# Altium PCB microwaveBoardAntenna.PcbDoc
Units mm, origin at the board's own origin, x right, y up, seen from the top; angles counter-clockwise.
Board outline 60 x 25 mm, 2 copper layers (Top Layer, Bottom Layer), stack 1.6 mm thick; 2 components, 2 nets, 15 pads, 6 vias.
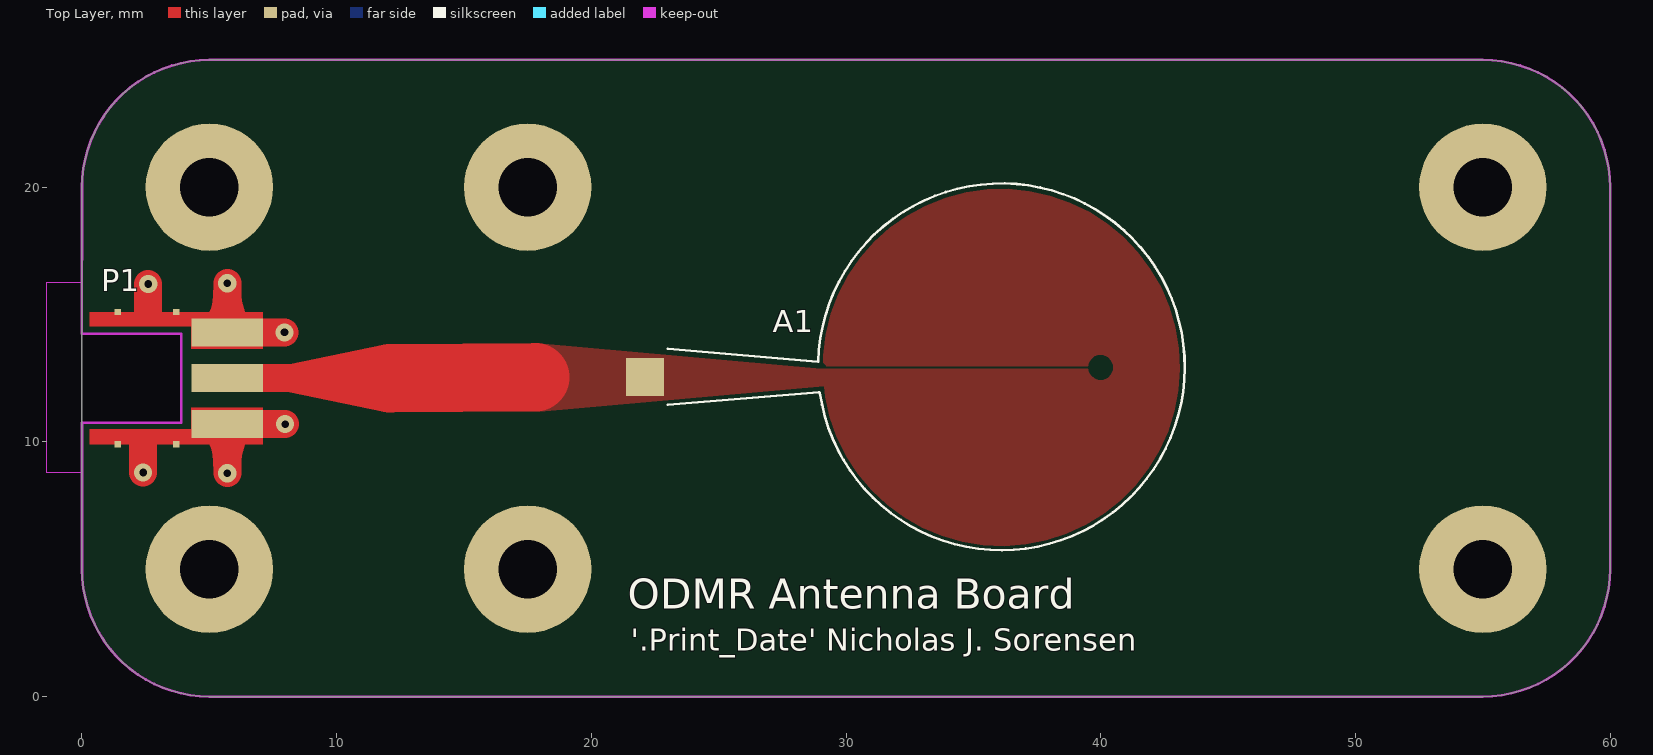
[diagram p0: Top Layer view]
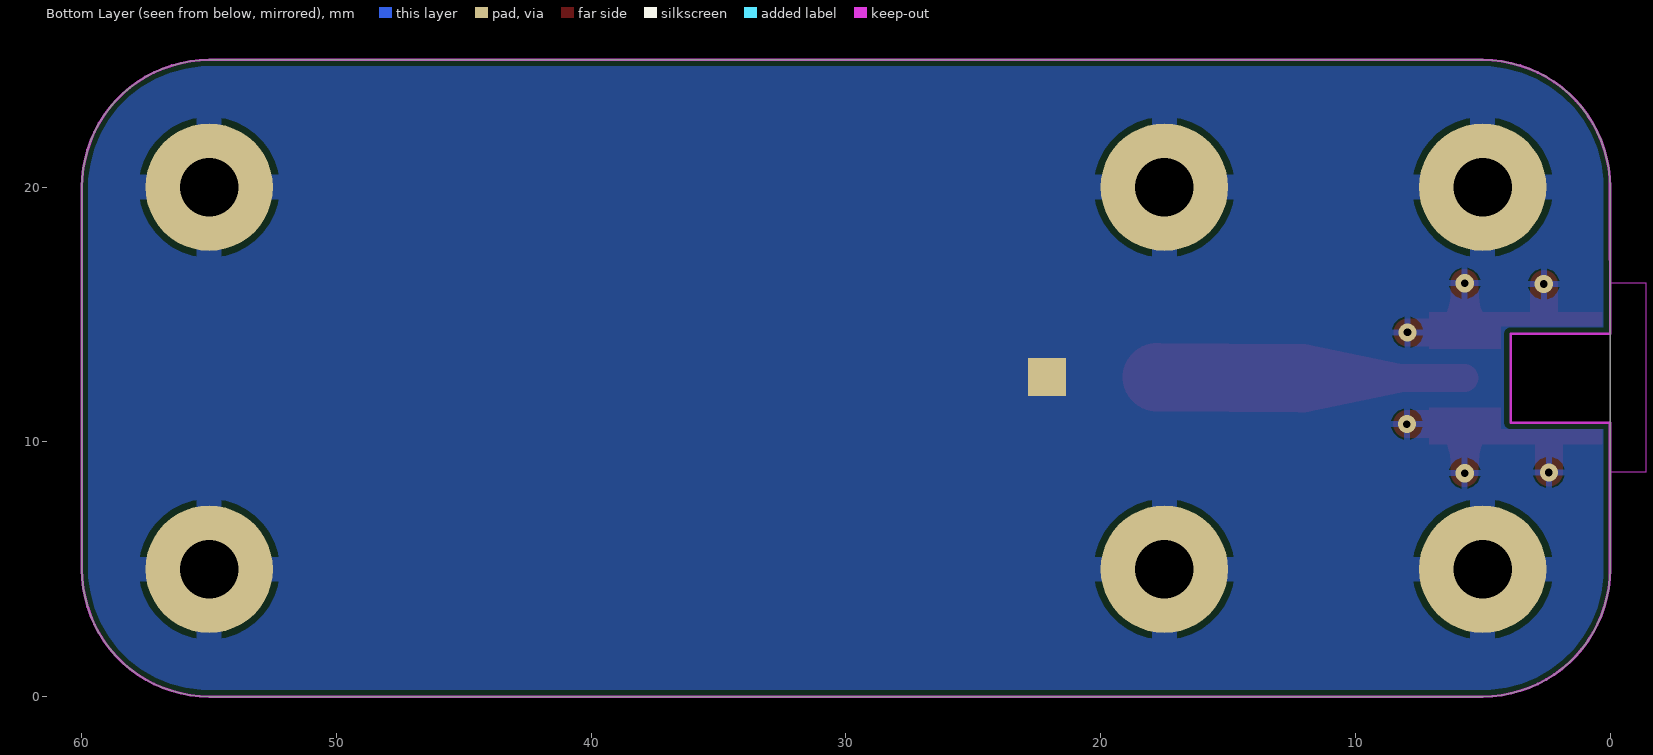
[diagram p1: Bottom Layer view, seen from below]

## Layer stack, top to bottom
Top Solder: solder mask 0.03, Solder Resist, Dk 3.5
Top Layer: signal copper 0.035
Dielectric 1: dielectric 1.53, FR-4, Dk 4.3
Bottom Layer: signal copper 0.035
Bottom Solder: solder mask 0.03, Solder Resist, Dk 3.5

## Board outline
5,0 cw(c5,5) 0,5 0,20 cw(c5,20) 5,25 55,25 cw(c55,20) 60,20 60,5 cw(c55,5) 55,0

## Design rules (kind name [scope] priority, off if disabled: settings)
BoardOutlineClearance [All] p1: gap=0.254 ignorepadtopadclearanceinfootprint=FALSE except(0: Arc-SplitContinuation Track-SplitContinuation SMDPad-SplitContinuation THPad-SplitContinuation Via-SplitContinuation Fill-SplitContinuation Poly-SplitContinuation Region-SplitContinuation Text-SplitContinuation)
Clearance [All] p1: gap=0.102 ignorepadtopadclearanceinfootprint=FALSE
HoleSize [All] p1: absolutevalues=TRUE maxlimit=6.3 minlimit=0.2 maxpercent=80.000 minpercent=20.000
MinimumAnnularRing [All] p1: minimumring=0.15
MinimumSolderMaskSliver [All] p1: minsoldermaskwidth=0.3
PolygonConnect PolygonConnectAntenna [InComponent('A1')] p1: connectstyle=Direct reliefconductorwidth=0.254 reliefentries=4 polygonreliefangle="90 Angle" airgapwidth=0.254
PolygonConnect PolygonConnect_1 [All] p2: connectstyle=Relief reliefconductorwidth=0.254 reliefentries=4 polygonreliefangle="90 Angle" airgapwidth=0.254
RoutingVias [All] p1: holewidth=0.3 width=0.71 viastyle="Through Hole" minholewidth=0.3 minwidth=0.71 maxholewidth=0.3 maxwidth=0.71
SilkToSilkClearance [All] p1: silktosilkclearance=0
SolderMaskExpansion [All] p1: expansion=0.102 istentingtop=FALSE
Width [All] p1: maxlimit=3 minlimit=1 preferedwidth=3 impedanceprofiledriven=TRUE impedanceprofileid={4A0EECF2-8292-4236-9601-4AF723990B04} impedanceprofilevalue=50.000000 minimp=50.000000 maximp=50.000000 favimp=50.000000
27 further rules are at their usual default settings.

## Components (designator, comment, footprint, x,y, rotation, side; value= is the part's Value field where it differs from the comment)
A1 "ODMR Antenna" ODMR_ANTENNA 40,12.95 r0 top
P1 "MMCXV-J-P-HF-ST-EM1" MMCXV-J-P-HF-ST-EM1 0,12.5 r90 top

## Footprints (in the part's own frame and the unit in brackets; to place one, negate y for a bottom-side part, rotate by r counter-clockwise, add the part's x,y. Pads: shape width x height; smd on the part's side, far side on the other; paste and mask are expansions set on the pad)
MMCXV-J-P-HF-ST-EM1 [mm]
  rect 1.1x2.8 smd: 1(0,-5.705)
  rect 0.254x0.254 smd: 2(-2.6,-1.395) 2(-2.6,-3.695) 2(2.6,-1.395) 2(2.6,-3.695)
  rect 1.1x2.8 smd paste-2 mask+0: 2(-1.8,-5.705) 2(1.8,-5.705)
  Top Layer region: 2.05,-4.295 1.15,-4.295 1.15,-7.105 2.6,-7.105 2.6,-0.305 2.05,-0.305
  Top Layer region: -2,-4.295 -1.15,-4.295 -1.15,-7.105 -2.6,-7.105 -2.6,-0.305 -2,-0.305
  Keep-Out Layer board cut-out: -3.7,0.005 -1.74,0.005 -1.74,-3.905 1.74,-3.905 1.74,0.005 3.75,0.005 3.75,1.405 -3.7,1.405
  Keep-Out Layer lines w0.1: -1.74,0.005 -1.74,-3.905 1.74,-3.905 1.74,0.005
  body extent -2.25,-6.71 2.25,0.69, height 2.11
ODMR_ANTENNA [mm]
  rect 1.5x1.5 smd paste-10 mask+0.102: 1(-17.9,-0.4)
  rect 1.5x1.5 smd far side paste-10 mask+0.102: 2(-17.9,-0.4)
  silkscreen extent -17,-7.2 3.3,7.2

## Part data
A1: library part "Patch Antenna", "antenna"
P1: library part PXX-SAM-00013, "50 OHM MMCX HIGH-VIBRATION JACK,", Supplier Part Number 1=MMCXV-J-P-HF-ST-EM1-ND, Index=13, LatestRevisionDate=10/22/2021, LatestRevisionNote=..., Manufacturer Part Number=MMCXV-J-P-HF-ST-EM1, Part Number=PXX-SAM-00013, Published=10/22/2021, Publisher=AlbertaSat, Supplier 1=Digi-key, Supplier Link=#https://www.digikey.ca/en/products/detail/samtec-inc/MMCXV-J-P-HF-ST-EM1/10218387?s=N4IgTCBcDaILJwMIA0BqBaAUugCugEgGLoDKAKugKJwCMIAugL5A#

## Free pads (board coordinates)
  round 5 hole 2.3: ""(5,5) ""(5,20) ""(17.5,5) ""(17.5,20) ""(55,5) ""(55,20)

## Via types
v1: diameter 0.71, hole 0.3, Top Layer to Bottom Layer, tented both sides, 6 vias

## Nets (pads, with @x,y where several pads share a name; then routed paths per layer and width w, separated by ;. In a path a pad name is that pad's centre, name@x,y a point inside that pad or via, vN(x,y) a via of type N, cw(c..) or ccw(c..) an arc to the next point about the centre after c; other vN are vias at no path point)
GND: A1.2 P1.2 pad. | length 10.4
  Top Layer w1.1: v1(2.4,8.8) 2.4,9.825 ; 2.6,15.175 v1(2.6,16.2) ; v1(5.705,8.77) 5.705,10.7 v1(7.975,10.7) ; v1(5.705,16.23) 5.705,14.3 v1(7.95,14.3)
NetA1_1: A1.1 P1.1 | length 12.1
  Top Layer w1.1: P1.1 12.1,12.5
  Top Layer w2.7: 12.1,12.5 17.8,12.543

## Polygon pours and split planes (outlines as drawn)
NetA1_1 on Top Layer "NETA1_1_L01_P000" (solid, pour order 0): 17.871,11.174 29.135,12.192 ccw(c36.096,12.924) 29.096,12.975 39.499,12.975 cw(c39.996,12.924) 39.499,12.873 29.096,12.873 17.796,13.891
GND on Bottom Layer "GND_L02_P001" (solid, pour order 1): -1.425,27.725 60.675,27.725 60.675,-1.925 -0.85,-1.925

## Keep-outs
Keep-Out Layer:
  lines w0.1: -0.005,14.24 0,20
  lines w0.102: 0,10.76 0,5 ccw(c5,5) 5,0 55,0 ccw(c55,5) 60,5 60,20 ccw(c55,20) 55,25 5,25 ccw(c5,20) 0,20

## Silkscreen, mask and mechanical layers (free items; w line width, h text height)
Top Overlay:
  text "ODMR Antenna Board" at 21.424,3.051 h2
  text "'.Print_Date' Nicholas J. Sorensen" at 21.551,1.503 h1.5